# Altium PCB PCB1.PcbDoc
Units mm, origin at the board's own origin, x right, y up, seen from the top; angles counter-clockwise.
Board outline 100 x 70 mm, 2 copper layers (Top Layer, Bottom Layer); 66 components, 111 nets, 389 pads, 32 vias.
Unrouted connection lines stored in the file: 2.
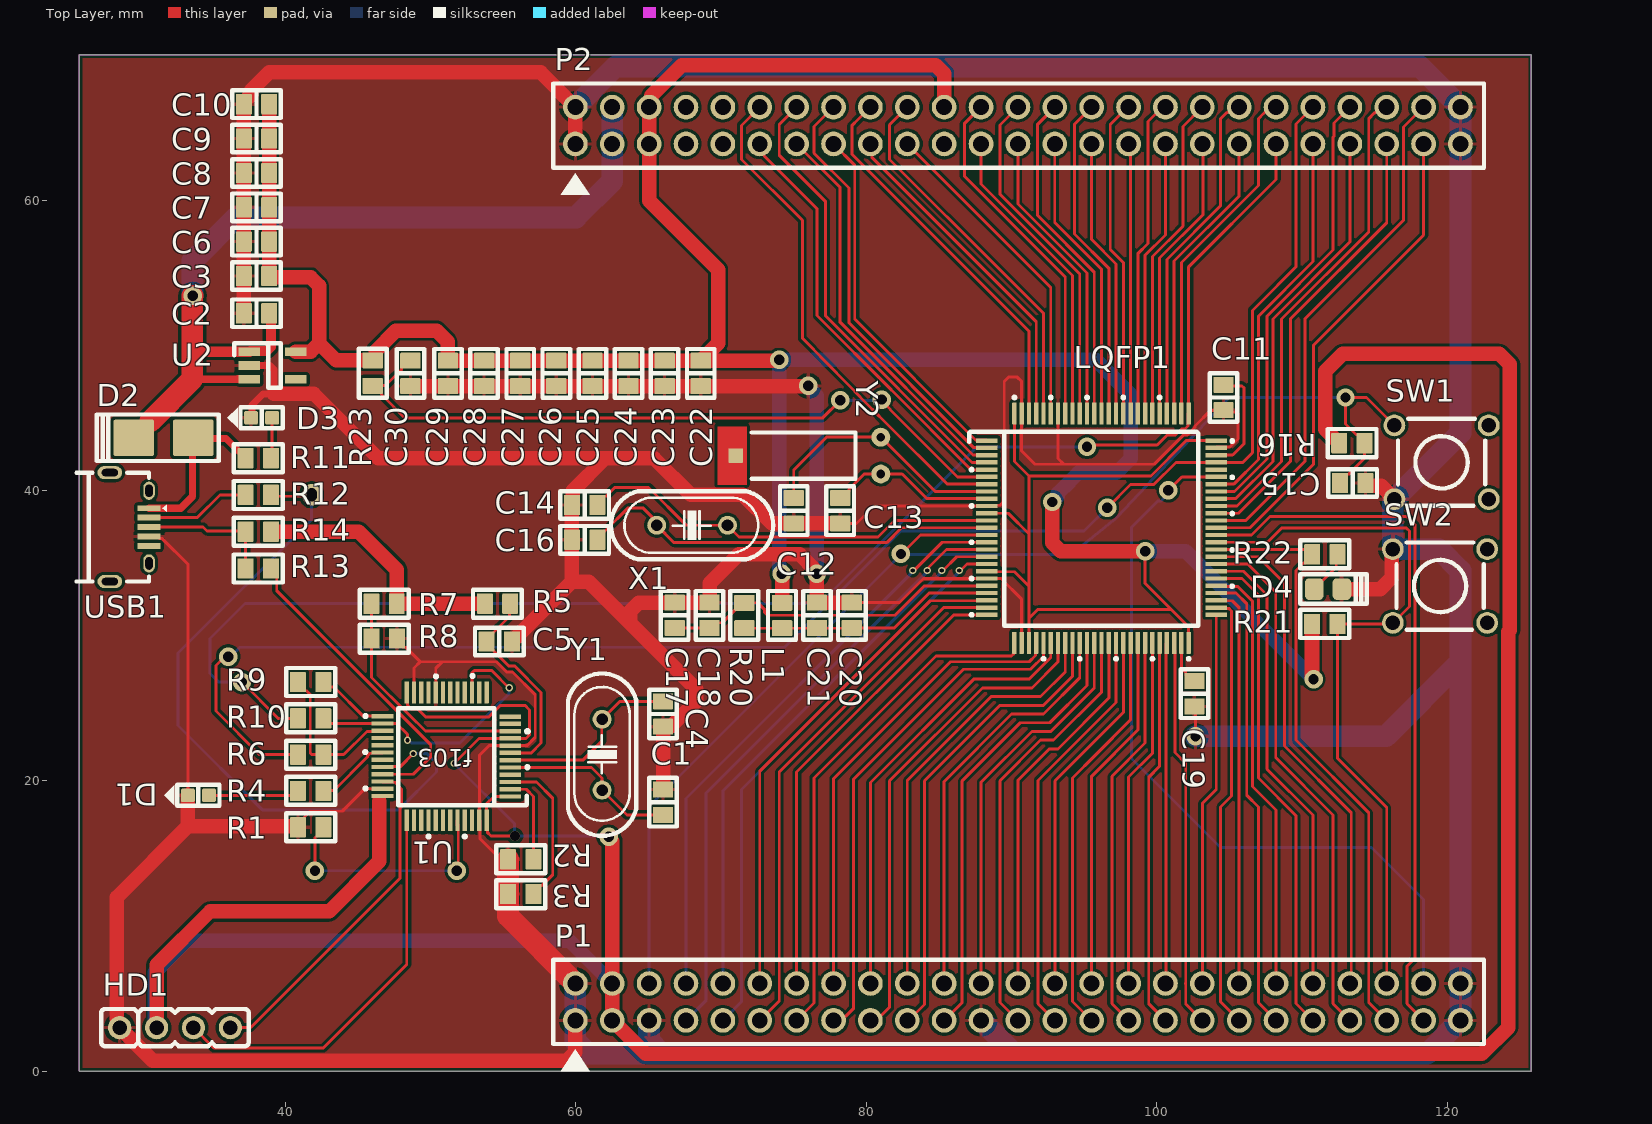
[diagram p0: Top Layer view]
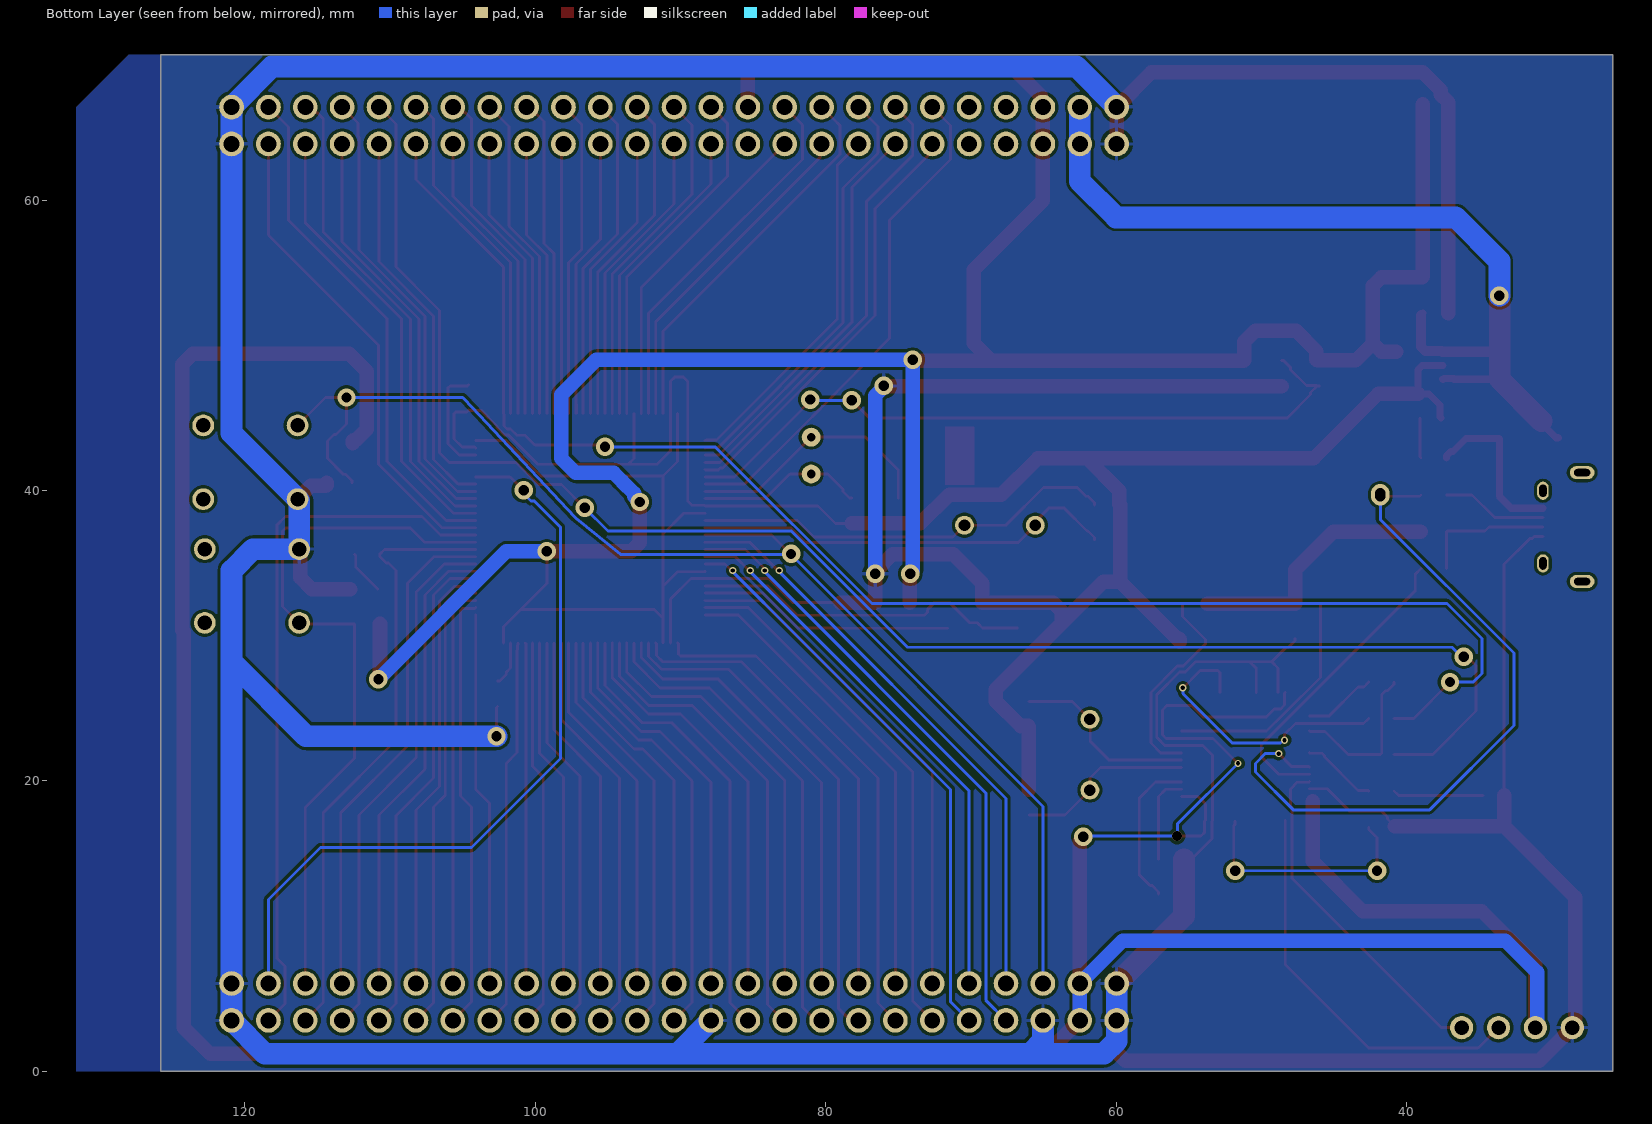
[diagram p1: Bottom Layer view, seen from below]

## Layer stack, top to bottom
Top Solder: solder mask 0.0102, Solder Resist, Dk 3.5
Top Layer: signal copper 0.0356
Dielectric 1: dielectric 0.32, FR-4, Dk 4.8
Bottom Layer: signal copper 0.0356
Bottom Solder: solder mask 0.0102, Solder Resist, Dk 3.5

## Board outline
25.806,0 25.806,70 125.806,70 125.806,0

## Design rules (kind name [scope] priority, off if disabled: settings)
Clearance [All] p1: gap=0.2 ignorepadtopadclearanceinfootprint=FALSE
PolygonConnect [All] p1: connectstyle=Relief reliefconductorwidth=0.254 reliefentries=4 polygonreliefangle="90 Angle" airgapwidth=0.254
RoomDefinition Sheet3 [InComponentClass('Sheet3')] p1: confinementstyle=ConfineIn formatcopy=TRUE lockcomponents=FALSE outline 178.943,120.523 363.22,120.523 363.22,141.859 178.943,141.859
RoomDefinition Sheet2 [InComponentClass('Sheet2')] p2: confinementstyle=ConfineIn formatcopy=TRUE lockcomponents=FALSE outline 178.943,95.377 352.679,95.377 352.679,119.253 178.943,119.253
RoomDefinition Sheet1 [InComponentClass('Sheet1')] p3: confinementstyle=ConfineIn formatcopy=TRUE lockcomponents=FALSE outline 130.601,0 148,0 148,67.31 130.601,67.31
RoutingVias [All] p1: holewidth=0.711 width=1.27 viastyle="Through Hole" minholewidth=0.711 minwidth=1.27 maxholewidth=0.711 maxwidth=1.27
SolderMaskExpansion [All] p1: expansion=0.102 istentingtop=FALSE
Width nguon [InNetClass('nguon')] p1: maxlimit=1.5 minlimit=0.2 preferedwidth=0.5
Width net [All] p2: maxlimit=0.2 minlimit=0.2 preferedwidth=0.2
30 further rules are at their usual default settings.

## Classes and differential pairs
net class nguon: +3V3 +5V GND V_USB
component class Sheet3: C11 C12 C13 C14 C15 C16 C17 C18 C19 C20 C21 C22 C23 C24 C25 C26 C27 C28 C29 C30 D4 L1 R16 R20 R21 R22 R23 SW1 SW2 X1 Y2
component class Sheet2: C1 C2 C3 C4 C5 C6 C7 C8 C9 C10 D1 D2 D3 HD1 R1 R2 R3 R4 R5 R6 R7 R8 R9 R10 R11 R12 R13 R14 U1 U2 USB1 Y1
component class Sheet1: P1 P2

## Components (designator, comment, footprint, x,y, rotation, side; value= is the part's Value field where it differs from the comment)
C1 "Cap" "Cap Ceramic 0805 SMD" 66,18.525 r270 top value=22pF
C2 "Cap" "Cap Ceramic 0805 SMD" 38,52.2 r0 top value=0.1uF
C3 "Cap" "Cap Ceramic 0805 SMD" 38,54.767 r0 top value=0.1uF
C4 "Cap" "Cap Ceramic 0805 SMD" 66,24.6 r90 top value=22pF
C5 "Cap" "Cap Ceramic 0805 SMD" 54.725,29.59 r0 top value=100nF
C6 "Cap" "Cap Ceramic 0805 SMD" 38,57.133 r0 top value=100nF
C7 "Cap" "Cap Ceramic 0805 SMD" 38,59.5 r0 top value=100nF
C8 "Cap" "Cap Ceramic 0805 SMD" 38,61.867 r0 top value=100nF
C9 "Cap" "Cap Ceramic 0805 SMD" 38,64.233 r0 top value=100nF
C10 "Cap" "Cap Ceramic 0805 SMD" 38,66.6 r0 top value=100nF
C11 "2.2uF" "Cap Ceramic 0805 SMD" 104.6,46.4 r90 top
C12 "6.8pF" "Cap Ceramic 0805 SMD" 75,38.6 r270 top
C13 "6.8pF" "Cap Ceramic 0805 SMD" 78.2,38.6 r270 top
C14 "20pF" "Cap Ceramic 0805 SMD" 60.6,39 r180 top
C15 "10nF/50V/C0603/10%" "Cap Ceramic 0805 SMD" 113.495,40.512 r180 top
C16 "20pF" "Cap Ceramic 0805 SMD" 60.6,36.6 r180 top
C17 "1uF" "Cap Ceramic 0805 SMD" 66.8,31.4 r270 top
C18 "100nF" "Cap Ceramic 0805 SMD" 69.2,31.4 r270 top
C19 "2.2uF" "Cap Ceramic 0805 SMD" 102.6,26 r90 top
C20 "1uF" "Cap Ceramic 0805 SMD" 79,31.4 r90 top
C21 "100nF" "Cap Ceramic 0805 SMD" 76.6,31.4 r90 top
C22 "100nF" "Cap Ceramic 0805 SMD" 68.595,48.06 r90 top
C23 "100nF" "Cap Ceramic 0805 SMD" 66.109,48.06 r90 top
C24 "100nF" "Cap Ceramic 0805 SMD" 63.622,48.06 r90 top
C25 "100nF" "Cap Ceramic 0805 SMD" 61.136,48.06 r90 top
C26 "100nF" "Cap Ceramic 0805 SMD" 58.649,48.06 r90 top
C27 "100nF" "Cap Ceramic 0805 SMD" 56.163,48.06 r90 top
C28 "100nF" "Cap Ceramic 0805 SMD" 53.677,48.06 r90 top
C29 "100nF" "Cap Ceramic 0805 SMD" 51.19,48.06 r90 top
C30 "1uF" "Cap Ceramic 0805 SMD" 48.6,48.06 r90 top
D1 "GREEN 0603" "LED 0603 SMD" 34,19 r180 top
D2 "1N4007_SMD" "1n4007 smd DO214" 31.6,43.625 r180 top
D3 "GREEN 0603" "LED 0603 SMD" 38.35,45 r180 top
D4 "GREEN 0603" "Led 0805G" 111.8,33.2 r0 top
HD1 "Programer ST_LINK" Header_4 32.39,3 r0 top value="Header 4"
L1 "150mH" "Res 0805 SMD" 74.2,31.385 r270 top value="150 mH"
LQFP1 "STM32F407VG_Q" STM32F407VG 96.2,37.4 r0 top
P1 "Header25*2" hearder25doi 59.96,3.5 r90 top
P2 "Header25*2" hearder25doi 59.96,63.86 r90 top
R1 "Res2" "Res 0805 SMD" 41.725,16.8 r180 top value=100K
R2 "Res2" "Res 0805 SMD" 56.2,14.6 r0 top value=10K
R3 "Res2" "Res 0805 SMD" 56.2,12.2 r0 top value=10K
R4 "Res2" "Res 0805 SMD" 41.725,19.3 r180 top value=100R
R5 "Res2" "Res 0805 SMD" 54.6,32.2 r0 top value=100k
R6 "Res2" "Res 0805 SMD" 41.725,21.8 r180 top value=22R
R7 "Res2" "Res 0805 SMD" 46.785,32.19 r180 top value=4K7
R8 "Res2" "Res 0805 SMD" 46.8,29.8 r0 top value=4K7
R9 "Res2" "Res 0805 SMD" 41.725,26.8 r180 top value=100R
R10 "Res2" "Res 0805 SMD" 41.725,24.3 r180 top value=22R
R11 "Res2" "Res 0805 SMD" 38.125,42.225 r0 top value=22E
R12 "Res2" "Res 0805 SMD" 38.125,39.692 r0 top value=22E
R13 "Res2" "Res 0805 SMD" 38.125,34.625 r0 top value=22E
R14 "Res2" "Res 0805 SMD" 38.125,37.158 r0 top value=22E
R16 "15K/R0603/1%" "Res 0805 SMD" 113.444,43.256 r180 top
R20 "47" "Res 0805 SMD" 71.6,31.385 r270 top
R21 "10K" "Res 0805 SMD" 111.57,30.8 r180 top
R22 "Res2" "Res 0805 SMD" 111.585,35.6 r0 top value=22
R23 "0" "Res 0805 SMD" 46,48.075 r90 top
SW1 "SW" "BUTTON 4 PIN" 119.617,41.935 r0 top value="SW chip 2 pin"
SW2 "SW" "BUTTON 4 PIN" 119.512,33.415 r0 top value="SW chip 2 pin"
U1 "STM32F103C8T6_Q" STM32F103C8T6_Q 51.081,21.685 r180 top
U2 "TLV73333PDBVR" "TLV73333PDBVR - SOT23-65" 39.2,48.6 r270 top
USB1 "USB_TYPE_B" USB_MICRO_B 30.6,38.775 r270 top
X1 "8Mhz" CRYSTAL 68,37.6 r0 top value=32,768khz
Y1 "8MHz" CRYSTAL 61.8,21.8 r270 top
Y2 "FC-135R - 32.768KHz" CR_32768 81,42.4 r90 top value=32.768KHz

## Footprints (in the part's own frame and the unit in brackets; to place one, negate y for a bottom-side part, rotate by r counter-clockwise, add the part's x,y. Pads: shape width x height; smd on the part's side, far side on the other; paste and mask are expansions set on the pad)
"1n4007 smd DO214" [mm] "DO214 4.57x2.79mm"
  rrect10% 2.8x2.5 smd mask+0.1: 1(-2.05,0) 2(2.05,0)
  silkscreen extent -3.8,-1.6 4.6,1.6, body extent -2.6,-1.3 2.6,1.3, height 2.5
"BUTTON 4 PIN" [mm] "4PIN 6X6MM"
  round 1.5 hole 1: 1(-3.25,2.54) 2(3.25,2.54) 3(-3.25,-2.54) 4(3.25,-2.54)
  silkscreen extent -3,-3 3,3, body extent -4,-3 3.97,3, height 4.9
"Cap Ceramic 0805 SMD" [mm] "Reflow Soldering"
  rrect10% 1.1x1.4 smd mask+0.1: 1(-0.875,0) 2(0.875,0)
  silkscreen extent -1.68,-0.95 1.68,0.95, body extent -1,-0.63 1,0.62, height 0.65
CR_32768 [mm] "32.768 KHz LOW FREQUENCY CYLINDRICALWATCH CRYSTAL"
  rrect10% 1x1 smd mask+0.1: 0(0,10)
  round 1.3 hole 0.6 mask+0.1: 1(-1.27,0) 2(1.27,0)
  Top Layer region: -2,9.25 -2,11.25 2,11.25 2,9.25
  silkscreen extent -1.59,1.75 1.59,8.9, body extent -1.73,-0.6 1.73,10.18, height 3.2
CRYSTAL [mm] "Quartz Crystal, Thru-Hole; 2 Leads; Body 11.35 x 4.65 x 13.46 mm (LxWxH max)"
  round 1.3 hole 0.8 mask+0.1: 1(-2.44,0) 2(2.44,0)
  silkscreen extent -5.59,-2.35 5.59,2.35, body extent -5.49,-2.25 5.49,2.25, height 3.6
Header_4 [mm] "Connector DIP, 4Pin_2.54mm"
  round 1.6 hole 1 mask+0.1: 1(-3.81,0) 2(-1.27,0) 3(1.27,0) 4(3.81,0)
  silkscreen extent -5.08,-1.28 5.08,1.28, body extent -5.08,-1.27 5.08,1.27, height 10.1
hearder25doi [mm] "50c"
  round 1.7 hole 1.1 mask+0.1: 1(0,0) 2(0,-2.54) 3(0,-5.08) 4(0,-7.62) 5(0,-10.16) 6(0,-12.7) 7(0,-15.24) 8(0,-17.78) 9(0,-20.32) 10(0,-22.86) 11(0,-25.4) 12(0,-27.94) 13(0,-30.48) 14(0,-33.02) 15(0,-35.56) 16(0,-38.1) 17(0,-40.64) 18(0,-43.18) 19(0,-45.72) 20(0,-48.26) 21(0,-50.8) 22(0,-53.34) 23(0,-55.88) 24(0,-58.42) 25(0,-60.96) 26(2.54,-60.96) 27(2.54,-58.42) 28(2.54,-55.88) 29(2.54,-53.34) 30(2.54,-50.8) 31(2.54,-48.26) 32(2.54,-45.72) 33(2.54,-43.18) 34(2.54,-40.64) 35(2.54,-38.1) 36(2.54,-35.56) 37(2.54,-33.02) 38(2.54,-30.48) 39(2.54,-27.94) 40(2.54,-25.4) 41(2.54,-22.86) 42(2.54,-20.32) 43(2.54,-17.78) 44(2.54,-15.24) 45(2.54,-12.7) 46(2.54,-10.16) 47(2.54,-7.62) 48(2.54,-5.08) 49(2.54,-2.54) 50(2.54,0)
  silkscreen extent -3.5,-62.58 4.17,1.52, body extent -1.13,-62.04 3.95,1.42, height 7.25
"LED 0603 SMD" [mm] "Reflow Soldering"
  rrect25% 0.95x0.95 smd mask+0.1: 1(-0.725,0) 2(0.725,0)
  silkscreen extent -1.45,-0.73 2.35,0.73, body extent -0.85,-0.45 0.85,0.45, height 0.9
"Led 0805G" [mm] "Chip LED; Green; Body 2.0 x 1.3 mm (LxW typ)"
  rrect50% 1.3x1.5 smd: 1(-0.95,0) 2(0.95,0)
  silkscreen extent -1.91,-1.02 2.67,1.02, body extent -1.04,-0.62 0.98,0.62, height 1.1
"Res 0805 SMD" [mm] "Reflow Soldering"
  rrect10% 1.1x1.4 smd mask+0.1: 1(-0.875,0) 2(0.875,0)
  silkscreen extent -1.69,-0.97 1.67,0.96, body extent -1,-0.62 1,0.63, height 0.62
STM32F103C8T6_Q [mm] "LQFP48"
  rrect10% 1.5x0.3 smd mask+0.07: 1(-4.4,2.765) 2(-4.4,2.265) 3(-4.4,1.765) 4(-4.4,1.265) 5(-4.4,0.765) 6(-4.4,0.265) 7(-4.4,-0.235) 8(-4.4,-0.735) 9(-4.4,-1.235) 10(-4.4,-1.735) 11(-4.4,-2.235) 12(-4.4,-2.735) 25(4.4,-2.765) 26(4.4,-2.265) 27(4.4,-1.765) 28(4.4,-1.265) 29(4.4,-0.765) 30(4.4,-0.265) 31(4.4,0.235) 32(4.4,0.735) 33(4.4,1.235) 34(4.4,1.735) 35(4.4,2.235) 36(4.4,2.735)
  rrect10% 0.3x1.5 smd mask+0.07: 13(-2.765,-4.4) 14(-2.265,-4.4) 15(-1.765,-4.4) 16(-1.265,-4.4) 17(-0.765,-4.4) 18(-0.265,-4.4) 19(0.235,-4.4) 20(0.735,-4.4) 21(1.235,-4.4) 22(1.735,-4.4) 23(2.235,-4.4) 24(2.735,-4.4) 37(2.735,4.4) 38(2.235,4.4) 39(1.735,4.4) 40(1.235,4.4) 41(0.735,4.4) 42(0.235,4.4) 43(-0.265,4.4) 44(-0.765,4.4) 45(-1.265,4.4) 46(-1.765,4.4) 47(-2.265,4.4) 48(-2.765,4.4)
  silkscreen extent -5.66,-5.6 5.65,5.58, body extent -4.5,-4.5 4.5,4.5, height 1.3
STM32F407VG [mm] "LQFP100"
  rrect10% 1.5x0.3 smd mask+0.07: 1(-7.9,6.03) 2(-7.9,5.53) 3(-7.9,5.03) 4(-7.9,4.53) 5(-7.9,4.03) 6(-7.9,3.53) 7(-7.9,3.03) 8(-7.9,2.53) 9(-7.9,2.03) 10(-7.9,1.53) 11(-7.9,1.03) 12(-7.9,0.53) 13(-7.9,0.03) 14(-7.9,-0.47) 15(-7.9,-0.97) 16(-7.9,-1.47) 17(-7.9,-1.97) 18(-7.9,-2.47) 19(-7.9,-2.97) 20(-7.9,-3.47) 21(-7.9,-3.97) 22(-7.9,-4.47) 23(-7.9,-4.97) 24(-7.9,-5.47) 25(-7.9,-5.97) 51(7.9,-5.97) 52(7.9,-5.47) 53(7.9,-4.97) 54(7.9,-4.47) 55(7.9,-3.97) 56(7.9,-3.47) 57(7.9,-2.97) 58(7.9,-2.47) 59(7.9,-1.97) 60(7.9,-1.47) 61(7.9,-0.97) 62(7.9,-0.47) 63(7.9,0.03) 64(7.9,0.53) 65(7.9,1.03) 66(7.9,1.53) 67(7.9,2.03) 68(7.9,2.53) 69(7.9,3.03) 70(7.9,3.53) 71(7.9,4.03) 72(7.9,4.53) 73(7.9,5.03) 74(7.9,5.53) 75(7.9,6.03)
  rrect10% 0.3x1.5 smd mask+0.07: 26(-6,-7.9) 27(-5.5,-7.9) 28(-5,-7.9) 29(-4.5,-7.9) 30(-4,-7.9) 31(-3.5,-7.9) 32(-3,-7.9) 33(-2.5,-7.9) 34(-2,-7.9) 35(-1.5,-7.9) 36(-1,-7.9) 37(-0.5,-7.9) 38(0,-7.9) 39(0.5,-7.9) 40(1,-7.9) 41(1.5,-7.9) 42(2,-7.9) 43(2.5,-7.9) 44(3,-7.9) 45(3.5,-7.9) 46(4,-7.9) 47(4.5,-7.9) 48(5,-7.9) 49(5.5,-7.9) 50(6,-7.9) 76(6,7.9) 77(5.5,7.9) 78(5,7.9) 79(4.5,7.9) 80(4,7.9) 81(3.5,7.9) 82(3,7.9) 83(2.5,7.9) 84(2,7.9) 85(1.5,7.9) 86(1,7.9) 87(0.5,7.9) 88(0,7.9) 89(-0.5,7.9) 90(-1,7.9) 91(-1.5,7.9) 92(-2,7.9) 93(-2.5,7.9) 94(-3,7.9) 95(-3.5,7.9) 96(-4,7.9) 97(-4.5,7.9) 98(-5,7.9) 99(-5.5,7.9) 100(-6,7.9)
  silkscreen extent -9.1,-9.05 9.05,9.05, body extent -8.07,-8.07 8.07,8.07, height 1.62
"TLV73333PDBVR - SOT23-65" [mm] "IC REG LINEAR 3.3V 300MA SOT23-5"
  rrect10% 0.6x1.5 smd: 1(-0.95,-1.7) 2(0,-1.7) 3(0.95,-1.7) 4(0.95,1.5) 5(-0.95,1.5)
  silkscreen extent -1.53,-2.73 1.53,0.46, body extent -1.5,-1.25 1.5,1.25, height 0.95
USB_MICRO_B [mm] "USB_MICRO_B, banlinhkien"
  rrect10% 0.4x1.6 smd: 1(0,0) 2(0.65,0) 3(1.3,0) 4(1.95,0) 5(2.6,0)
  oval 0.9x1.7 hole 0.5 slot 1.1 at 90 deg: ""(-2.45,-2.7) ""(5.05,-2.7)
  oval 1.25x0.8 hole 0.85 slot 0.5 at 90 deg: ""(-1.2,0) ""(3.8,0)
  silkscreen extent -2.45,-5 5.05,1.22, body extent -2.45,-5 5.05,0.29, height 2.61

## Part data
C1 C2 C3 C4 C5 C6 C7 C8 C9 C10: "Capacitor", LatestRevisionDate=17-Jul-2002, LatestRevisionNote="Re-released for DXP Platform.", PackageReference=RAD-0.3, Published=8-Jun-2000, Publisher="Altium Limited"
C11 C12 C13 C14 C16 C17 C18 C19 C20 C21 C22 C23 C24 C25 C26 C27 C28 C29 C30: library part 22pF/50V/C0603/10%, "CAP CER 22PF 50V NP0 0603", Capacitance=22pF, Manufacturer=Kemet, Manufacturer Part Number=C0603C220K5GACTU, Operating Temperature="-55°C ~ 125°C", Package / Case="0603 (1608 Metric)", Ratings=-, Supplier Part Number 1=399-7875-1-ND, Temperature Coefficient="C0G, NP0", Tolerance=±10%, Voltage - Rated=50V, Applications="General Purpose", Category=Capacitors, ComponentLink1Description=http://www.kemet.com/docfinder?Partnumber=C0603C220K5GACTU, ComponentLink1URL=http://www.kemet.com/docfinder?Partnumber=C0603C220K5GACTU, Features=-, Height - Seated (Max)=-, Lead Spacing=-, Lead Style=-, Mounting Type="Surface Mount, MLCC", Packaging=Digi-Reel®, RoHS="RoHS Compliant", Size / Dimension="0.063\" L x 0.031\" W (1.60mm x 0.80mm)", SUPPLIER 1=Digi-Key, Thickness (Max)="0.034\" (0.87mm)"
C15: library part 10nF/50V/C0603/10%_1, "CAP CER 10000PF 50V X7R 0603", Capacitance=10000pF, Manufacturer="Murata Electronics North America", Manufacturer Part Number=GRM188R71H103KA01D, Operating Temperature="-55°C ~ 125°C", Package / Case="0603 (1608 Metric)", Ratings=-, Supplier Part Number 1=490-1512-1-ND, Temperature Coefficient=X7R, Tolerance=±10%, Voltage - Rated=50V, Applications="General Purpose", Category=Capacitors, ComponentLink1Description=http://www.murata.com/~/media/webrenewal/support/library/catalog/products/capacitor/mlcc/c02e.ashx, ComponentLink1URL=http://www.murata.com/~/media/webrenewal/support/library/catalog/products/capacitor/mlcc/c02e.ashx, Features=-, Height - Seated (Max)=-, Lead Spacing=-, Lead Style=-, Mounting Type="Surface Mount, MLCC", Packaging="Cut Tape (CT)", RoHS="RoHS Compliant", Size / Dimension="0.063\" L x 0.031\" W (1.60mm x 0.80mm)", SUPPLIER 1=Digi-Key, Thickness (Max)="0.035\" (0.90mm)"
D1 D3 D4: library part "LED GREEN 0603", "LED GREEN CLEAR 0603 SMD", Color=Green, Current - Test=20mA, Lens Color=Colorless, Manufacturer="Lite-On Inc.", Manufacturer Part Number=LTST-C190KGKT, Millicandela Rating=35mcd, Package / Case="0603 (1608 Metric)", Supplier Part Number 1=160-1435-1-ND, Voltage - Forward (Vf) (Typ)=2V, Category=Optoelectronics, ComponentLink1Description=http://optoelectronics.liteon.com/upload/download/DS22-2000-074/S_110_LTST-C190KGKT.pdf, ComponentLink1URL=http://optoelectronics.liteon.com/upload/download/DS22-2000-074/S_110_LTST-C190KGKT.pdf, Features=-, Height (Max)=0.80mm, Lens Style/Size="Rectangle with Flat Top, 1.10mm x 0.80mm", Lens Transparency=Clear, Mounting Type="Surface Mount", Packaging="Cut Tape (CT)", RoHS="RoHS Compliant", Size / Dimension="1.60mm L x 0.80mm W", SUPPLIER 1=Digi-Key, Viewing Angle=130°, Wavelength - Dominant=571nm, Wavelength - Peak=574nm
D2: "Diode LS 1A 1000V DO214-AC", ComponentLink1Description=Datasheet, ComponentLink1URL="D:\Dropbox\Datasheets\Diodes and Rectifiers\Diodes\1N400X.pdf", Unit Price=0.0072
HD1: library part Header4, "Header 4"
L1: library part L1, "Inductor"
R1 R2 R3 R4 R5 R6 R7 R8 R9 R10 R11 R12 R13 R14 R22: "Resistor", LatestRevisionDate=17-Jul-2002, LatestRevisionNote="Re-released for DXP Platform.", PackageReference=AXIAL-0.4, Published=8-Jun-2000, Publisher="Altium Limited"
R16 R21: library part 15K/R0603/1%_1, "RES SMD 15K OHM 1% 1/10W 0603", Manufacturer=Yageo, Manufacturer Part Number=RC0603FR-0715KL, Operating Temperature="-55°C ~ 155°C", Package / Case="0603 (1608 Metric)", Power (Watts)="0.1W, 1/10W", Resistance (Ohms)=15k, Supplier Device Package=0603, Supplier Part Number 1=311-15.0KHRCT-ND, Temperature Coefficient=±100ppm/°C, Tolerance=±1%, Category=Resistors, ComponentLink1Description=http://www.yageo.com/NewPortal/yageodocoutput?fileName=/pdf/R-Chip/PYu-RC_Group_51_RoHS_L_3.pdf, ComponentLink1URL=http://www.yageo.com/NewPortal/yageodocoutput?fileName=/pdf/R-Chip/PYu-RC_Group_51_RoHS_L_3.pdf, Composition="Thick Film", Features="Moisture Resistant", Height="0.022\" (0.55mm)", Number of Terminations=2, Packaging=Digi-Reel®, RoHS="RoHS Compliant", Size / Dimension="0.063\" L x 0.031\" W (1.60mm x 0.80mm)", SUPPLIER 1=Digi-Key
R20 R23: library part 10K/R0603/1%, "RES SMD 10K OHM 1% 1/10W 0603", Manufacturer=Yageo, Manufacturer Part Number=RC0603FR-0710KL, Operating Temperature="-55°C ~ 155°C", Package / Case="0603 (1608 Metric)", Power (Watts)="0.1W, 1/10W", Resistance (Ohms)=10k, Supplier Device Package=0603, Supplier Part Number 1=311-10.0KHRTR-ND, Temperature Coefficient=±100ppm/°C, Tolerance=±1%, Category=Resistors, ComponentLink1Description=http://www.yageo.com/NewPortal/yageodocoutput?fileName=/pdf/R-Chip/PYu-RC_Group_51_RoHS_L_3.pdf, ComponentLink1URL=http://www.yageo.com/NewPortal/yageodocoutput?fileName=/pdf/R-Chip/PYu-RC_Group_51_RoHS_L_3.pdf, Composition="Thick Film", Features="Moisture Resistant", Height="0.022\" (0.55mm)", Number of Terminations=2, Packaging="Tape & Reel (TR)", Pricing 1="5000=0.00167, 10000=0.00145, 25000=0.00128, 50000=0.00117, 125000=0.00115 (USD)", RoHS="RoHS Compliant", Size / Dimension="0.063\" L x 0.031\" W (1.60mm x 0.80mm)", Stock 1=11440000, SUPPLIER 1=Digi-Key
SW1 SW2: library part SW2, "Switch button 2 pin"
U2: library part 20#TLV73333PDBVR, "Linear Voltage Regulator IC Positive Fixed 1 Output 3.3V 300mA SOT-23-5", Digikey=296-40673-1-ND
USB1: "USB TYPE B"
X1: library part XT32k, "Crystal 32,768kHz for timer real"
Y1: library part XTAL, "Crystal Oscillator", Farnell=1611803, LatestRevisionDate=17-Jul-2002, LatestRevisionNote="Re-released for DXP Platform.", PackageReference=R38, Published=8-Jun-2000, Publisher="Altium Limited"
Y2: "Crystal FC-135R - 32.768KHz", ComponentLink1Description=Datasheet, ComponentLink1URL="D:\Dropbox\Datasheets\Passive Components\Crystals\HC49S.pdf", Unit Price=0.0440

## Via types
v1: diameter 1.27, hole 0.711, Top Layer to Bottom Layer, 23 vias
v2: diameter 0.5, hole 0.3, Top Layer to Bottom Layer, 8 vias
v3: diameter 0.711, hole 0.711, Top Layer to Bottom Layer, 1 vias

## Nets (pads, with @x,y where several pads share a name; then routed paths per layer and width w, separated by ;. In a path a pad name is that pad's centre, name@x,y a point inside that pad or via, vN(x,y) a via of type N, cw(c..) or ccw(c..) an arc to the next point about the centre after c; other vN are vias at no path point)
+3V3: C3.2 C6.2 C7.2 C8.2 C9.2 C10.2 C22.2 C23.2 C24.2 C25.2 C26.2 C27.2 C28.2 C29.2 HD1.2 L1.1 LQFP1.11 LQFP1.19 LQFP1.28 LQFP1.50 LQFP1.75 LQFP1.100 P1.2 P1.49 P2.3 P2.40 P2.48 R5.1 R7.1 R14.2 R16.2 R21.2 R23.2 U1.1 U1.9 U1.24 U1.36 U1.48 U2.5 | length 499.6
  Top Layer w0.2: U1.24 48.396,26.035 48.396,25.22 48.681,24.935 49.119,24.935 49.654,24.4 54,24.4 54.8,25.2 56.483,25.2 56.8,24.883 56.8,23.166 56.554,22.92 U1.9 53.32,22.92 v2(51.6,21.2) ; U1.1 54.351,18.92 53.846,18.415 U1.48 53.896,17.235 53.896,16.455 54.151,16.2 v3(55.8,16.2) ; LQFP1.19 88.33,34.4 90.2,34.4 91.2,33.4 ; LQFP1.11 89.77,38.43 91.2,37 ; LQFP1.100 90.2,42 91.2,41 ; LQFP1.28 91.2,31.2 ; v1(99.2,35.8) 99.2,33.6 101,31.8 ; LQFP1.50 102.2,30.6 101,31.8 ; LQFP1.75 102.03,43.43 99.6,41 91.2,41 ; 91.2,31.2 91.8,31.8 101,31.8 ; 91.2,31.2 91.2,33.4 ; 91.2,33.4 91.2,37 ; 91.2,37 91.2,41
  Top Layer w1: HD1.2 31.12,7.32 34.8,11 43,11 46.462,14.462 46.462,18.6 ; C10.2 C9.2 C8.2 C7.2 C6.2 38.875,54.726 38.925,54.676 41.721,54.676 42.307,54.09 42.307,50.136 ; R14.2 45.042,37.158 47.66,34.54 R7.1 53.715,32.19 R5.1 ; U2.5 41.721,49.55 42.307,50.136 ; v1(62.25,16.15) 62.25,16.077 62.5,15.827 P1.49 P1.2 64.8,1.2 122.4,1.2 124.2,3 124.2,30.262 124.317,30.379 124.317,48.683 123.6,49.4 112.8,49.4 111.6,48.2 111.6,44.225 112.369,43.456 112.519,43.456 112.569,43.406 R16.2 ; v1(74,49) 73.935,48.935 C22.2@68.745,48.935 ; v1(74.175,34.262) 74.2,34.237 L1.1 ; P2.40 85.36,68.689 84.774,69.275 67.275,69.275 65.174,67.174 65.174,66.534 P2.48 P2.3 65.04,59.96 69.8,55.2 69.8,50.14 68.795,49.135 68.795,48.985 C22.2@68.745,48.935 ; v1(92.8,39.2) 92.8,36.386 93.386,35.8 v1(99.2,35.8) ; R21.2 110.695,27.105 v1(110.8,27) ; 42.307,50.136 43.493,48.95 R23.2 46.15,48.95 46.2,49 46.2,49.6 47.6,51 50.4,51 51.158,50.242 51.158,48.967 C29.2 C28.2 C27.2 C26.2 C25.2 C24.2 C23.2 C22.2 C22.2@68.745,48.935
  Bottom Layer w0.2: v2(51.6,21.2) 55.782,17.018 55.782,16.218 v3(55.8,16.2) 62.2,16.2 v1(62.25,16.15)
  Bottom Layer w1: HD1.2 31.005,3.115 31.005,3.539 31,3.544 31,6.8 33.2,9 59.54,9 P1.49 P1.2 ; v1(74.175,34.262) 74.175,34.335 74,34.51 v1(74,49) 95.8,49 98.2,46.6 98.2,42.2 97.2,41.2 94.586,41.2 94,40.614 94,40.6 93.2,39.8 93.2,39.6 v1(92.8,39.2) ; v1(99.2,35.8) 102,35.8 v1(110.8,27)
+5V: C2.2 D2.2 P2.2 P2.49 U2.1 U2.3 | length 62.4
  Top Layer w0.5: D2.2 29.7,43.625 30.7,44.625 D2.2@30.7,44.775 ; 33.575,47.65 36.7,47.65 ; 33.575,51.485 33.8,51.71 ; 36.7,47.7 37.45,47.7 U2.3 ; U2.1 U2.1@37.55,49.6 ; C2.2 C2.2@39,52.075
  Top Layer w0.7: 33.575,49.55 U2.1 ; U2.1@37.55,49.6 38.707,49.6 39,49.893 C2.2@39,52.075
  Top Layer w1.5: D2.2@30.7,44.775 33.575,47.65 33.575,49.55 33.575,51.485 33.575,53.375 v1(33.6,53.4)
  Bottom Layer w1.5: v1(33.6,53.4) 33.6,55.8 36.6,58.8 60,58.8 62.5,61.3 P2.2 P2.49
GND: C1.1 C2.1 C3.1 C4.1 C5.2 C6.1 C7.1 C8.1 C9.1 C10.1 C11.1 C12.2 C13.2 C14.2 C15.1 C16.2 C17.1 C18.1 C19.1 C20.2 C21.2 C22.1 C23.1 C24.1 C25.1 C26.1 C27.1 C28.1 C29.1 C30.1 D1.2 D3.2 D4.2 HD1.1 LQFP1.10 LQFP1.20 LQFP1.27 LQFP1.74 LQFP1.94 LQFP1.99 P1.1 P1.3 P1.12 P1.25 P1.26 P1.50 P2.1 P2.25 P2.26 P2.50 R1.2 R2.1 R3.1 R8.2 SW1.3 SW2.1 U1.8 U1.20 U1.23 U1.35 U1.47 U2.2 USB1.4 | length 617.6
  Top Layer w0.2: USB1.4 31.2,36.825 31.35,36.675 31.513,36.675 33.275,34.913 D1.2 ; R1.2@40.8,16.875 41.3,17.375 41.3,17.5 41.7,17.9 43.9,17.9 45.45,19.45 U1.35 ; R8.2 47.675,29.65 48.125,29.2 48.275,29.2 49.275,28.2 ; U1.23 48.846,27.771 49.275,28.2 ; U1.20 50.346,27.746 50.8,28.2 ; R2.1@54.875,14.598 54.875,14.808 54.592,14.808 53.396,16.004 53.396,17.235 U1.47 53.346,21.746 54.02,22.42 U1.8 56.62,22.42 57.2,23 57.2,25.922 55.629,27.494 55.231,27.494 54.524,28.2 50.8,28.2 ; P2.1 60.2,64.1 P2.1@60.2,64.6 ; C13.2 79.325,37.725 80.53,38.93 LQFP1.10 88.35,38.98 89.215,38.98 89.5,39.265 89.5,47.5 89.8,47.8 90.4,47.8 90.7,47.5 LQFP1.99 90.7,42.717 91.617,41.8 93.6,41.8 ; C20.2 82.279,32.275 83.934,33.93 LQFP1.20 89.27,33.93 90.7,32.5 LQFP1.27 ; LQFP1.94 93.2,42.2 93.6,41.8 ; C19.1 102.671,25.054 v1(102.671,23.071) ; LQFP1.74 104.15,42.98 105.033,42.98 105.6,43.547 105.6,45.283 105.483,45.4 104.725,45.4 C11.1 104.592,45.517 103.717,45.517 102.63,44.43 102.63,44.349 102.111,43.83 101.864,43.83 99.834,41.8 93.6,41.8 ; 49.275,28.2 50.8,28.2
  Top Layer w0.5: U2.2 38.907,48.6 39.2,48.307 39.2,46.642 38.442,46.642 37.683,45.883 37.683,45.058 D3.2
  Top Layer w1: HD1.1@28.39,3.614 28.39,11.99 33.275,16.875 ; HD1.1 30.855,0.725 59.374,0.725 59.96,1.311 P1.1 ; D1.2 33.275,16.875 ; C2.1 C3.1 C6.1 C7.1 C8.1 C9.1 C10.1 37.125,66.75 37.625,67.25 37.625,67.558 38.867,68.8 57.56,68.8 P2.50 P2.1 ; 39.2,46.642 41.958,46.642 46.4,42.2 62,42.2 ; R1.2@40.8,16.875 33.275,16.875 ; C30.1 C29.1 C28.1 C27.1 C26.1 C25.1 C24.1 C23.1 C22.1 75.985,47.185 v1(76,47.2) ; C5.2 55.6,29.74 55.65,29.79 55.8,29.79 59.725,33.715 ; C1.1 C4.1 66.05,23.775 66.575,23.775 68.286,25.486 68.286,26.314 63.739,30.861 ; C13.2 C12.2 73.475,37.725 71.5,39.7 67.9,39.7 65.4,42.2 62,42.2 ; C20.2 C21.2 76.6,34.216 76.587,34.229 76.587,34.302 76.452,34.437 76.452,34.548 75.4,35.6 71.2,35.6 69.207,33.607 69.207,32.282 C18.1 C17.1 64.325,32.275 63.739,31.689 63.739,30.861 ; D4.2 115.4,33.2 116.2,34 116.2,35.892 SW2.1 ; C15.1 114.37,40.362 114.42,40.312 115.45,40.312 SW1.3 ; 59.725,33.715 60.885,33.715 63.739,30.861 ; 59.725,33.715 C16.2 C14.2 59.775,39.05 59.775,39.975 62,42.2
  Top Layer w1.5: R2.1 R3.1 55.325,10.675 P1.50
  Bottom Layer w1: v1(76,47.2) 76,47.127 76.6,46.527 76.6,34.242 v1@76.587,34.229
  Bottom Layer w1.5: P1.50 P1.1 59.96,2.079 60.839,1.2 65.919,1.2 ; P2.50 59.96,66.406 62.754,69.2 118.126,69.2 120.92,66.406 P2.26 P2.25 120.92,43.947 SW1.3 116.262,39.29 SW2.1 119.445,35.955 120.92,34.48 120.92,28.2 ; P1.3 65.04,2.079 65.919,1.2 ; P1.12 87.9,3.494 90.194,1.2 ; v1(102.671,23.071) 115.791,23.071 120.92,28.2 ; 65.919,1.2 90.194,1.2 ; 90.194,1.2 118.626,1.2 120.92,3.494 P1.25 P1.26 120.92,28.2
  other v1: 76.587,34.262
LED_STLINK: R4.1 U1.30 | length 5.2
  Top Layer w0.2: R4.1 42.633,19.333 43.333,19.333 45.631,21.631 45.631,21.715 45.816,21.9 46.631,21.9 U1.30
NetC1_2: C1.2 U1.5 Y1.2 | length 12.4
  Top Layer w0.2: U1.5 61.08,20.92 61.8,20.2 Y1.2 63.51,17.65 C1.2
NetC4_2: C4.2 U1.6 Y1.1 | length 13.1
  Top Layer w0.2: U1.6 60.467,21.42 61.775,22.727 61.775,24.215 Y1.1 63.035,25.475 C4.2
NetC11_2: C11.2 LQFP1.73 | length 7.6
  Top Layer w0.2: LQFP1.73 105.23,42.43 106,43.2 106,47.083 105.883,47.2 104.675,47.2 C11.2
NetC12_1: C12.1 LQFP1.8 Y2.2 | length 17.7
  Top Layer w0.2: C12.1 75,41.4 77.27,43.67 Y2.2 84.74,39.93 LQFP1.8
NetC13_1: C13.1 LQFP1.9 Y2.1 | length 11.6
  Top Layer w0.2: C13.1 78.35,39.475 78.8,39.925 78.8,40.075 79.855,41.13 Y2.1 82.47,41.13 84.17,39.43 LQFP1.9
NetC14_1: C14.1 LQFP1.12 X1.2 | length 29.3
  Top Layer w0.2: C14.1 61.475,39.15 61.925,39.6 62.075,39.6 62.675,40.2 65,40.2 67.6,37.6 X1.2 71.24,36.8 80.8,36.8 81.93,37.93 LQFP1.12
NetC16_1: C16.1 LQFP1.13 X1.1 | length 29.4
  Top Layer w0.2: C16.1 61.475,36.75 61.925,37.2 62,37.2 63.6,38.8 64.6,38.8 65.56,37.84 X1.1 66.76,36.4 81.4,36.4 82.43,37.43 LQFP1.13
NetC17_2: C17.2 C18.2 LQFP1.21 R20.1 | length 23.5
  Top Layer w0.2: C17.2 C18.2 69.564,30.889 70.079,30.889 71.45,32.26 R20.1 72.517,32.26 73,31.777 73,31.6 73.2,31.4 81.97,31.4 84,33.43 LQFP1.21
NetC19_2: C19.2 LQFP1.49 | length 3.1
  Top Layer w0.2: LQFP1.49 101.7,27.775 102,27.475 102,27.325 102.45,26.875 C19.2
NetC20_1: C20.1 C21.1 L1.2 LQFP1.22 R20.2 | length 17.7
  Top Layer w0.2: R20.2 L1.2 76.6,30.51 78.985,30.51 C20.1 81.925,30.525 84.33,32.93 LQFP1.22
NetC30_2: C30.2 LQFP1.6 R23.1 | length 49.3
  Top Layer w0.2: R23.1 46.15,47.2 46.6,46.75 46.6,46.6 48.2,45 77,45 v1(78.2,46.2) ; R23.1@46.15,47.218 46.883,47.218 48,48.335 48,48.485 48.45,48.935 C30.2 ; v1(81.056,46.258) 81.731,45.47 81.738,45.462 86.27,40.93 LQFP1.6
  Bottom Layer w0.2: v1(78.2,46.2) 80.998,46.2 v1(81.056,46.258)
NetD1_1: D1.1 R4.2 | length 6.2
  Top Layer w0.2: D1.1 40.55,19 R4.2
NetD3_1: D3.1 R11.2 | length 2.8
  Top Layer w0.2: R11.2 39.075,42.3 D3.1
NetD4_1: D4.1 R22.2 | length 3.1
  Top Layer w0.2: D4.1 112.367,34.717 112.367,35.507 R22.2
NetR1_1: R1.1 U1.44 | length 16.5
  Top Layer w0.2: v1(42.025,13.804) 42.025,16.083 42.142,16.2 42.15,16.2 42.6,16.65 R1.1 ; U1.44@51.796,17.245 51.796,17.01 51.896,16.91 51.896,13.896 v1(51.8,13.8)
  Bottom Layer w0.2: v1(42.025,13.804) 51.796,13.804 v1(51.8,13.8)
NetR2_2: R2.2 U1.2 | length 6.1
  Top Layer w0.2: U1.2 56.58,19.42 57.075,18.925 R2.2
NetR3_2: R3.2 U1.3 | length 10.6
  Top Layer w0.2: U1.3 57.28,19.92 58.4,18.8 58.4,13.525 57.675,12.8 57.525,12.8 57.075,12.35 R3.2
NetR7_2: R7.2 R8.1 U1.10 | length 16.2
  Top Layer w0.2: R7.2 45.925,32.175 R8.1 45.925,27.125 48.515,24.535 49.63,23.42 U1.10
NetR9_1: R9.1 U1.25 | length 5.1
  Top Layer w0.2: R9.1 42.933,26.467 43.333,26.467 45.35,24.45 U1.25
NetR12_1: R12.1 USB1.2 | length 7.3
  Top Layer w0.2: USB1.2 33.925,38.125 35.492,39.692 R12.1
NetR13_1: R13.1 R14.1 USB1.3 | length 9.3
  Top Layer w0.2: USB1.3 34.325,37.475 34.6,37.2 37.208,37.2 R14.1 R13.1
NRST: C15.2 LQFP1.14 P1.48 R16.1 SW1.1 | length 89.8
  Top Layer w0.2: v1(82.385,35.623) 82.423,35.623 83.73,36.93 LQFP1.14 ; C15.2 112.62,40.662 113.07,41.112 113.22,41.112 114.319,42.212 R16.1 114.319,43.406 113.869,43.856 113.719,43.856 113,44.575 v1(113,46.4) 114.442,46.4 SW1.1
  Bottom Layer w0.2: P1.48 65.04,18.24 82.385,35.585 v1(82.385,35.623) ; v1@82.4,35.6 94.117,35.6 97.186,38.072 ccw(c96.6,38.8) 97.283,38.161 104.883,46.283 105,46.4 v1(113,46.4)
PA0: LQFP1.23 P1.45 | length 35.1
  Top Layer w0.2: P1.45 72.66,20.66 84.4,32.4 88.27,32.4 LQFP1.23
PA1: LQFP1.24 P1.6 | length 36.6
  Top Layer w0.2: P1.6 74,4.84 74,20.6 85.33,31.93 LQFP1.24
PA2: LQFP1.25 P1.44 | length 32.1
  Top Layer w0.2: P1.44 75.2,20.6 86.03,31.43 LQFP1.25
PA3: LQFP1.26 P1.7 | length 35.3
  Top Layer w0.2: P1.7 76.4,4.7 76.4,20.2 84.8,28.6 90,28.6 90.15,28.75 90.15,29.45 LQFP1.26
PA4: LQFP1.29 P1.43 | length 32.4
  Top Layer w0.2: P1.43 77.74,20.14 85.8,28.2 91.215,28.2 91.65,28.635 91.65,29.45 LQFP1.29
PA5: LQFP1.30 P1.8 | length 35
  Top Layer w0.2: P1.8 78.027,3.787 78.587,3.787 79.13,4.33 79.13,20.13 86.683,27.683 91.317,27.683 92.2,28.566 LQFP1.30
PA6: LQFP1.31 P1.42 | length 30.8
  Top Layer w0.2: P1.42 80.28,19.88 87.4,27 91.2,27 92.7,28.5 LQFP1.31
PA7: LQFP1.32 P1.9 | length 33.6
  Top Layer w0.2: P1.9 80.686,3.5 81.089,3.903 81.103,3.903 81.6,4.4 81.6,20 88,26.4 91.4,26.4 93.2,28.2 LQFP1.32
PA8: LQFP1.67 P2.22 | length 29
  Top Layer w0.2: LQFP1.67 105.43,39.43 108,42 108,51.8 113.3,57.1 P2.22
PA9: LQFP1.68 P2.29 | length 31
  Top Layer w0.2: LQFP1.68 105.364,39.93 107.6,42.166 107.6,52 112.15,56.55 112.15,64.336 112.2,64.386 112.2,65.3 P2.29
PA10: LQFP1.69 P2.21 | length 26.9
  Top Layer w0.2: LQFP1.69 105.299,40.43 107,42.131 107,52 110.76,55.76 P2.21
PA11: LQFP1.70 P1.27 | length 53.3
  Top Layer w0.2: v1(100.8,40) 101.73,40.93 LQFP1.70
  Bottom Layer w0.2: v1(100.8,40) 100.8,39.767 100.301,39.268 100.068,39.268 98.265,37.465 98.265,21.535 104.4,15.4 114.8,15.4 118.38,11.82 P1.27
PA15: LQFP1.77 P2.31 | length 24
  Top Layer w0.2: LQFP1.77 101.7,55.7 107,61 107,65.6 107.397,65.997 107.411,65.997 107.814,66.4 P2.31
PB0: LQFP1.35 P1.40 | length 28.6
  Top Layer w0.2: P1.40 85.36,19.96 90,24.6 92.2,24.6 94.7,27.1 LQFP1.35
PB1: LQFP1.36 P1.11 | length 31.3
  Top Layer w0.2: P1.11 86.6,4.74 86.6,20 90.6,24 92.634,24 95.192,26.558 95.192,29.492 LQFP1.36
PB2: LQFP1.37 P1.39 | length 27.5
  Top Layer w0.2: P1.39 87.9,19.9 91.4,23.4 92.7,23.4 95.7,26.4 LQFP1.37
PB3: LQFP1.89 P2.37 | length 23.2
  Top Layer w0.2: P2.37 91.8,65.22 91.8,58.931 95.7,55.031 LQFP1.89
PB4: LQFP1.90 P2.13 | length 20.5
  Top Layer w0.2: P2.13 90.44,59.726 95.2,54.966 LQFP1.90
PB5: LQFP1.91 P2.38 | length 23.9
  Top Layer w0.2: P2.38 89.2,65.16 89.2,60.4 94.7,54.9 LQFP1.91
PB6: LQFP1.92 P2.12 | length 21.2
  Top Layer w0.2: P2.12 87.9,61.1 94.2,54.8 LQFP1.92
PB7: LQFP1.93 P2.39 | length 24.5
  Top Layer w0.2: P2.39 86.75,65.25 86.75,61.65 93.7,54.7 LQFP1.93
PB8: LQFP1.95 P2.10 | length 22.7
  Top Layer w0.2: P2.10 92.7,53.98 LQFP1.95
PB9: LQFP1.96 P2.41 | length 26
  Top Layer w0.2: P2.41 81.6,65.18 81.6,62.8 89.4,55 92.2,52.2 LQFP1.96
PB10: LQFP1.47 P1.34 | length 23.5
  Top Layer w0.2: P1.34 100.65,6.09 100.65,29.45 LQFP1.47
PB11: LQFP1.48 P1.18 | length 26.8
  Top Layer w0.2: LQFP1.48 101.25,28.85 101.25,21.95 102,21.2 102,6.191 ccw(c103.14,6.04) 102,5.889 102,4.64 102.059,4.581 P1.18
PB12: LQFP1.51 P1.33 | length 25.8
  Top Layer w0.2: P1.33 103.14,18.433 104.1,19.393 LQFP1.51
PB13: LQFP1.52 P1.19 | length 30.2
  Top Layer w0.2: LQFP1.52 104.15,31.88 104.867,31.88 104.965,31.88 105.15,31.695 105.15,18.95 104.4,18.2 104.4,4.78 P1.19
PB14: LQFP1.53 P1.32 | length 27.7
  Top Layer w0.2: LQFP1.53 104.13,32.4 105.2,32.4 105.68,31.92 P1.32
PB15: LQFP1.54 P1.20 | length 31.9
  Top Layer w0.2: LQFP1.54 105.47,32.93 106.2,32.2 106.2,19 107,18.2 107,4.72 P1.20
PC0: LQFP1.15 P1.47 | length 40.8
  Top Layer w0.2: v2@83.2,34.4 85.23,36.43 LQFP1.15
  Bottom Layer w0.2: P1.47 67.58,18.78 v2@83.2,34.4
  other v2: 83.2,34.48
PC1: LQFP1.16 P1.4 | length 42.6
  Top Layer w0.2: v2(84.2,34.48) 84.2,34.561 84.289,34.65 84.289,34.689 85.53,35.93 LQFP1.16
  Bottom Layer w0.2: P1.4 68.97,4.89 68.97,19.17 84.2,34.4 v2(84.2,34.48)
PC2: LQFP1.17 P1.46 | length 38.2
  Top Layer w0.2: v2(85.2,34.48) 85.28,34.48 86.234,35.434 87.102,35.434 87.106,35.43 LQFP1.17
  Bottom Layer w0.2: P1.46 70.12,19.32 85.2,34.4 v2(85.2,34.48)
PC3: LQFP1.18 P1.5 | length 39.8
  Top Layer w0.2: v2(86.4,34.48) 86.48,34.48 86.93,34.93 LQFP1.18
  Bottom Layer w0.2: P1.5 71.4,4.78 71.4,19.4 82,30 86.4,34.4 v2(86.4,34.48)
PC4: LQFP1.33 P1.41 | length 30
  Top Layer w0.2: P1.41 82.82,20.02 88.6,25.8 92,25.8 93.7,27.5 93.7,28.733 LQFP1.33
PC5: LQFP1.34 P1.10 | length 32.5
  Top Layer w0.2: P1.10 82.9,3.5 84,4.6 84,20 89.2,25.2 92.2,25.2 94.2,27.2 LQFP1.34
PC6: LQFP1.63 P2.24 | length 33.7
  Top Layer w0.2: LQFP1.63 106.43,37.43 110.8,41.8 110.8,50 118.38,57.58 P2.24
PC7: LQFP1.64 P2.27 | length 35.6
  Top Layer w0.2: LQFP1.64 106.13,37.93 110.2,42 110.2,51.8 117,58.6 117,65.02 P2.27
PC8: LQFP1.65 P2.23 | length 31.2
  Top Layer w0.2: LQFP1.65 105.63,38.43 109.2,42 109.2,51.8 115.84,58.44 P2.23
PC9: LQFP1.66 P2.28 | length 33.4
  Top Layer w0.2: LQFP1.66 105.53,38.93 108.6,42 108.6,51.8 114.6,57.8 114.6,65.6 115.007,66.007 115.041,66.007 115.434,66.4 P2.28
PC10: LQFP1.78 P2.19 | length 20.4
  Top Layer w0.2: LQFP1.78 101.2,55.8 105.68,60.28 P2.19
PC11: LQFP1.79 P2.32 | length 23.4
  Top Layer w0.2: LQFP1.79 100.7,55.9 104.4,59.6 104.4,65.6 104.827,66.027 104.901,66.027 105.274,66.4 P2.32
PC12: LQFP1.80 P2.18 | length 19.8
  Top Layer w0.2: LQFP1.80 100.2,56 103.2,59 103.2,63.8 P2.18
PC13: LQFP1.7 P2.45 | length 35.1
  Top Layer w0.2: P2.45 71.4,65.14 71.4,62.8 75.6,58.6 75.6,50.483 80.388,45.603 ccw(c81.056,46.258) 80.402,45.589 81.43,44.583 85.584,40.43 LQFP1.7
PD0: LQFP1.81 P2.33 | length 22.5
  Top Layer w0.2: LQFP1.81 99.7,56.1 101.8,58.2 101.8,65.06 P2.33
PD1: LQFP1.82 P2.17 | length 19.1
  Top Layer w0.2: LQFP1.82 99.2,56.2 100.6,57.6 P2.17
PD2: LQFP1.83 P2.34 | length 22
  Top Layer w0.2: LQFP1.83 98.7,56.3 99.4,57 99.4,65.4 100.4,66.4 P2.34
PD3: LQFP1.84 P2.16 | length 18.6
  Top Layer w0.2: P2.16 98.2,63.72 LQFP1.84
PD4: LQFP1.85 P2.35 | length 22
  Top Layer w0.2: LQFP1.85 97.7,55.7 96.8,56.6 96.8,65.2 98,66.4 P2.35
PD5: LQFP1.86 P2.15 | length 19.9
  Top Layer w0.2: P2.15 95.52,57.28 97.2,55.6 LQFP1.86 97.15,45.35 LQFP1.86@97.15,45.95
PD6: LQFP1.87 P2.36 | length 22.6
  Top Layer w0.2: P2.36 94.34,65.22 94.34,57.66 96.7,55.3 LQFP1.87
PD7: LQFP1.88 P2.14 | length 19.9
  Top Layer w0.2: P2.14 92.98,58.454 96.2,55.234 LQFP1.88
PD8: LQFP1.55 P1.31 | length 29.9
  Top Layer w0.2: LQFP1.55 104.15,33.38 105.586,33.38 106.6,32.366 106.6,19.6 108.22,17.98 P1.31
PD9: LQFP1.56 P1.21 | length 34.2
  Top Layer w0.2: LQFP1.56 105.87,33.93 107,32.8 107,20.2 109.6,17.6 109.6,4.66 P1.21
PD10: LQFP1.57 P1.30 | length 32.2
  Top Layer w0.2: LQFP1.57 105.97,34.43 107.6,32.8 107.6,20.8 110.76,17.64 P1.30
PD11: LQFP1.58 P1.22 | length 36.5
  Top Layer w0.2: LQFP1.58 106.27,34.93 108.2,33 108.2,21.6 112.15,17.65 112.15,4.65 P1.22
PD12: LQFP1.59 P1.29 | length 35
  Top Layer w0.2: LQFP1.59 106.97,35.43 108.8,33.6 108.8,22.4 113.4,17.8 113.4,6.14 P1.29
PD13: LQFP1.60 P1.23 R22.1 | length 42
  Top Layer w0.2: LQFP1.60 110.38,35.93 R22.1 110.71,35.45 110.26,35 110.11,35 109.6,34.49 109.6,22.8 114.6,17.8 114.6,4.74 P1.23
PD14: LQFP1.61 P1.28 R21.1 SW2.3 | length 50.6
  Top Layer w0.2: LQFP1.61 107.63,36.43 108.6,37.4 117.2,37.4 117.4,37.2 117.4,32.012 116.188,30.8 R21.1 112.445,21.555 115.84,18.16 P1.28
PD15: LQFP1.62 P1.24 | length 49.3
  Top Layer w0.2: LQFP1.62 106.53,36.93 107.8,38.2 117.2,38.2 117.8,37.6 117.8,7.8 117.23,7.23 117.23,4.65 P1.24
PE0: LQFP1.97 P2.9 | length 22.3
  Top Layer w0.2: 80.373,62.943 91.7,51.616 LQFP1.97
PE1: LQFP1.98 P2.42 | length 26.7
  Top Layer w0.2: P2.42 79.457,65.577 79,65.12 79,63.166 91.2,50.966 LQFP1.98
PE2: LQFP1.1 P2.8 | length 25.2
  Top Layer w0.2: P2.8 79.2,62.4 79.2,51.8 87.52,43.48 88.25,43.48 LQFP1.1
PE3: LQFP1.2 P2.43 | length 29.5
  Top Layer w0.2: P2.43 76.4,65.06 76.4,63.226 78.8,60.826 78.8,51.541 87.398,42.943 88.287,42.943 LQFP1.2
PE4: LQFP1.3 P2.7 | length 27.4
  Top Layer w0.2: P2.7 78.2,60.86 78.2,51.575 87.345,42.43 LQFP1.3
PE5: LQFP1.4 P2.44 | length 31.5
  Top Layer w0.2: P2.44 74,65.2 74,63.086 77.2,59.886 77.2,52.01 87.28,41.93 LQFP1.4
PE6: LQFP1.5 P2.6 | length 29.6
  Top Layer w0.2: P2.6 72.947,63.573 72.947,63.053 76.6,59.4 76.6,52.044 81.718,46.926 81.728,46.916 ccw(c81.87,47.057) 81.729,46.915 87.114,41.53 87.27,41.53 87.4,41.4 88.27,41.4 LQFP1.5
PE7: LQFP1.38 P1.13 | length 29.9
  Top Layer w0.2: P1.13 89.2,4.74 89.2,20 92,22.8 92.9,22.8 96.2,26.1 LQFP1.38
PE8: LQFP1.39 P1.38 | length 26.4
  Top Layer w0.2: P1.38 90.44,20.04 92.6,22.2 93.2,22.2 96.7,25.7 LQFP1.39
PE9: LQFP1.40 P1.14 | length 28.7
  Top Layer w0.2: P1.14 91.83,4.65 91.83,20.03 97.2,25.4 LQFP1.40
PE10: LQFP1.41 P1.37 | length 25.4
  Top Layer w0.2: P1.37 93,6.06 93,20 97.7,24.7 LQFP1.41
PE11: LQFP1.42 P1.15 | length 28.2
  Top Layer w0.2: P1.15 95.5,3.5 94.2,4.8 94.2,20.2 95.8,21.8 98.2,24.2 LQFP1.42
PE12: LQFP1.43 P1.36 | length 24.8
  Top Layer w0.2: P1.36 95.52,20.32 98.7,23.5 LQFP1.43
PE13: LQFP1.44 P1.16 | length 27.4
  Top Layer w0.2: P1.16 96.91,4.65 96.91,20.31 99.2,22.6 LQFP1.44
PE14: LQFP1.45 P1.35 | length 24.1
  Top Layer w0.2: P1.35 98.06,20.26 99.7,21.9 LQFP1.45
PE15: LQFP1.46 P1.17 | length 26.8
  Top Layer w0.2: LQFP1.46 100.2,21 99.45,20.25 99.45,4.65 P1.17
ST_SWCLK: HD1.3 U1.37 | length 27.6
  Top Layer w0.2: HD1.3 35.06,1.6 42.6,1.6 48.346,7.346 U1.37
ST_SWDIO: HD1.4 U1.34 | length 23.7
  Top Layer w0.2: HD1.4 37.6,3 38,3.4 47.896,13.296 47.896,18.15 48,18.254 48,19.4 47.731,19.669 47.731,19.715 47.546,19.9 46.731,19.9 U1.34
STM_rst: C5.1 R5.2 U1.7 | length 14.5
  Top Layer w0.2: R5.2 55.427,32.152 55.427,31.317 53.85,29.74 53.85,29.44 55.396,27.894 55.794,27.894 57.6,26.088 57.6,22.6 56.92,21.92 U1.7
SWCLK: LQFP1.76 P2.20 R10.2 | length 105.1
  Top Layer w0.2: v1(37,26.8) 39.5,24.3 R10.2 ; v1(95.2,43) 95.33,43.13 100.03,43.13 100.7,43.8 101.269,43.8 101.699,44.23 101.945,44.23 102.15,44.435 102.15,45.25 LQFP1.76 102.2,55.4 108.22,61.42 P2.20
  Bottom Layer w0.2: v1(37,26.8) 35.4,26.8 34.8,27.4 34.8,29.8 37.217,32.217 76.817,32.217 87.6,43 v1(95.2,43)
SWDIO: LQFP1.72 P2.30 R6.2 | length 113
  Top Layer w0.2: v1(36.045,28.555) 35.818,28.555 35.2,27.936 35.2,24.8 38.2,21.8 R6.2 ; v1(96.6,38.8) 98.2,40.4 99.8,40.4 101.33,41.93 LQFP1.72 105.93,41.93 106.6,42.6 106.6,52.4 107,52.8 109.6,55.4 109.6,65.24 P2.30
  Bottom Layer w0.2: v1(36.045,28.555) 36.218,28.555 36.864,29.2 74.366,29.2 82.366,37.2 95,37.2 v1(96.6,38.8)
T_JTCK: R10.1 U1.15 U1.26 | length 20
  Top Layer w0.2: R10.1 42.95,23.95 U1.26 47.65,23.95 48.4,23.2 v2(48.4,22.8) ; U1.15 52.846,27.446 53,27.6 54.2,27.6 v2(55.4,26.4)
  Bottom Layer w0.2: v2(48.4,22.8) 48.467,22.8 48.667,22.6 52,22.6 55.4,26 v2(55.4,26.4)
T_JTMS: R6.1 R9.2 U1.27 | length 11
  Top Layer w0.2: R9.2 40.85,26.65 41.3,26.2 41.45,26.2 41.7,25.95 41.7,21.917 41.817,21.8 R6.1 42.605,21.805 44.005,21.805 45.6,23.4 46.631,23.4 U1.27
USB_DM: R12.2 U1.32 | length 48.9
  Top Layer w0.2: R12.2 39.092,39.6 v1(41.8,39.6) v1(41.8,39.8) ; U1.32 46.704,20.973 47.899,20.973 v2(48.8,21.874)
  Bottom Layer w0.2: v1(41.8,39.6) 41.8,38 32.6,28.8 32.6,23.8 38.4,18 47.8,18 50.4,20.6 50.4,21.2 49.726,21.874 v2(48.8,21.874)
USB_DP: R13.2 U1.33 | length 21.3
  Top Layer w0.2: R13.2 39.395,34.23 39.395,33.089 50,22.484 50,21.659 48.791,20.45 U1.33
V_USB: D2.1 R11.1 USB1.1 | length 11.6
  Top Layer w0.5: USB1.1 32.775,38.775 33.6,39.6 33.6,43.575 35.9,43.575 36.8,42.675 36.95,42.675 37.25,42.375 R11.1
pads on no net: LQFP1.71 P2.4 P2.5 P2.11 P2.46 P2.47 SW1.2 SW1.4 SW2.2 SW2.4 U1.4 U1.11 U1.12 U1.13 U1.14 U1.16 U1.17 U1.18 U1.19 U1.21 U1.22 U1.28 U1.29 U1.31 U1.38 U1.39 U1.40 U1.41 U1.42 U1.43 U1.45 U1.46 U2.4 USB1. USB1.5 Y2.0

## Polygon pours and split planes (outlines as drawn)
GND on Top Layer "GND_L01_P000" (solid, pour order 0): 25.806,70 125.806,70 125.806,0 25.806,0
GND on Bottom Layer "GND_L02_P001" (solid, pour order 1): 25.806,70 128,70 131.6,66.4 131.6,0 25.806,0

## Keep-outs
Top Layer:
  lines w0.05: 25.806,0 125.806,0 125.806,70 25.806,70 ; 25.806,0.025 25.806,70.025

## Text inside footprints (layer, text, board x,y; h text height)
HD1: Mechanical 2 "1" at 28.326,2.746 h1.2; Mechanical 2 "4" at 35.946,2.746 h1.2
LQFP1: Mechanical 2 "75" at 102.98,42.6 h0.5 r90; Mechanical 2 "50" at 101.6,30.6 h0.5; Mechanical 2 "25" at 90.1,31.3 h0.5 r90; Mechanical 2 "51" at 102.85,31.5 h0.5 r90; Mechanical 2 "76" at 101.7,43.7 h0.5; Mechanical 2 "100" at 90.2,43.7 h0.5; Mechanical 2 "26" at 90.3,30.6 h0.5; Mechanical 2 "1" at 89.8,42.9 h0.5
P1: Mechanical 1 "25" at 119.94,3.77 h0.5 r90; Mechanical 1 "26" at 119.94,4.87 h0.5 r90; Mechanical 1 "50" at 61.44,4.97 h0.5 r90; Mechanical 1 "1" at 61.14,4.27 h0.5 r90
P2: Mechanical 1 "1" at 61.14,64.63 h0.5 r90; Mechanical 1 "50" at 61.44,65.33 h0.5 r90; Mechanical 1 "26" at 119.94,65.23 h0.5 r90; Mechanical 1 "25" at 119.94,64.13 h0.5 r90
U1: Top Overlay "f103" at 52.851,22.165 h1.2 r180; Mechanical 1 "1" at 54.461,19.115 h0.5 r180; Mechanical 1 "12" at 54.371,24.655 h0.5 r180; Mechanical 1 "13" at 53.291,24.385 h0.5 r90; Mechanical 1 "24" at 48.261,25.115 h0.5 r270; Mechanical 1 "25" at 47.651,24.605 h0.5 r270; Mechanical 1 "36" at 47.681,19.435 h0.5 r270; Mechanical 1 "37" at 49.091,18.775 h0.5 r180; Mechanical 1 "48" at 54.261,18.745 h0.5 r180
U2: Mechanical 2 "1" at 38.45,49.655 h0.4 r270; Mechanical 2 "3" at 38.455,47.754 h0.4 r270; Mechanical 2 "4" at 39.574,47.783 h0.4 r270; Mechanical 2 "5" at 39.536,49.674 h0.4 r270
USB1: Mechanical 2 "1" at 29.6,38.875 h0.8 r270; Mechanical 2 "5" at 29.6,36.475 h0.8 r270